# Altium PCB 88路激光器工程.PcbDoc (part 1 of 2)
Units mm, origin at the board's own origin, x right, y up, seen from the top; angles counter-clockwise.
Board outline 290.3 x 80 mm, 2 copper layers (Top Layer, Bottom Layer), stack 1.4 mm thick; 159 components, 203 nets, 686 pads, 305 vias.
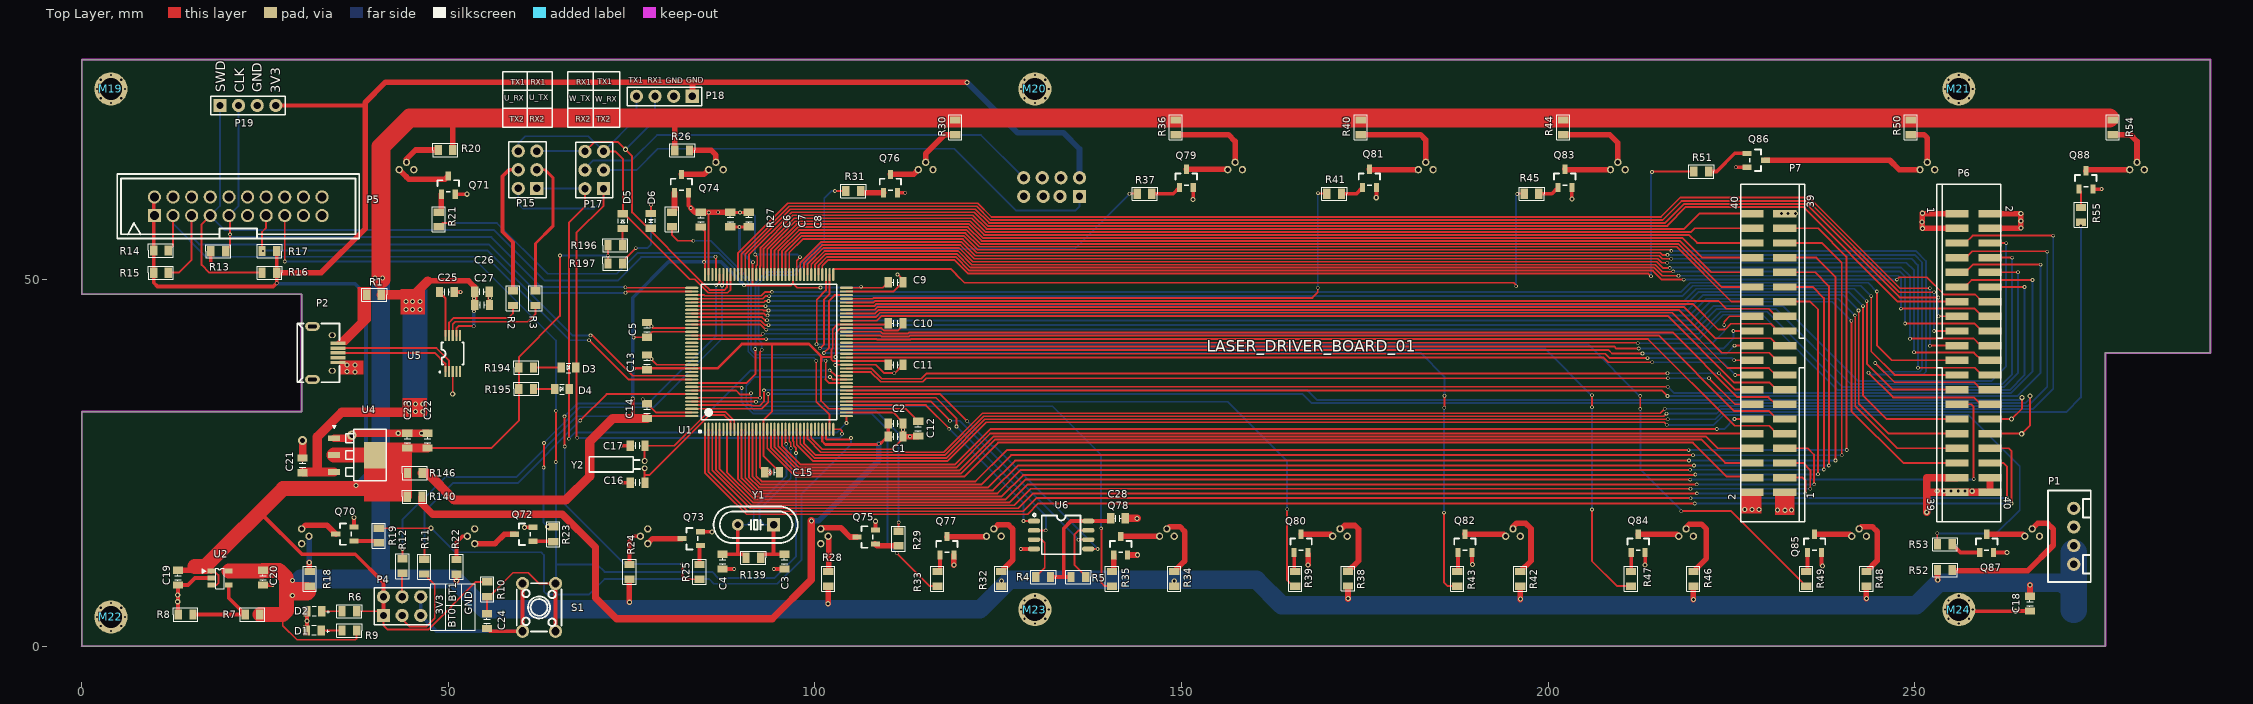
[diagram p0: Top Layer view]
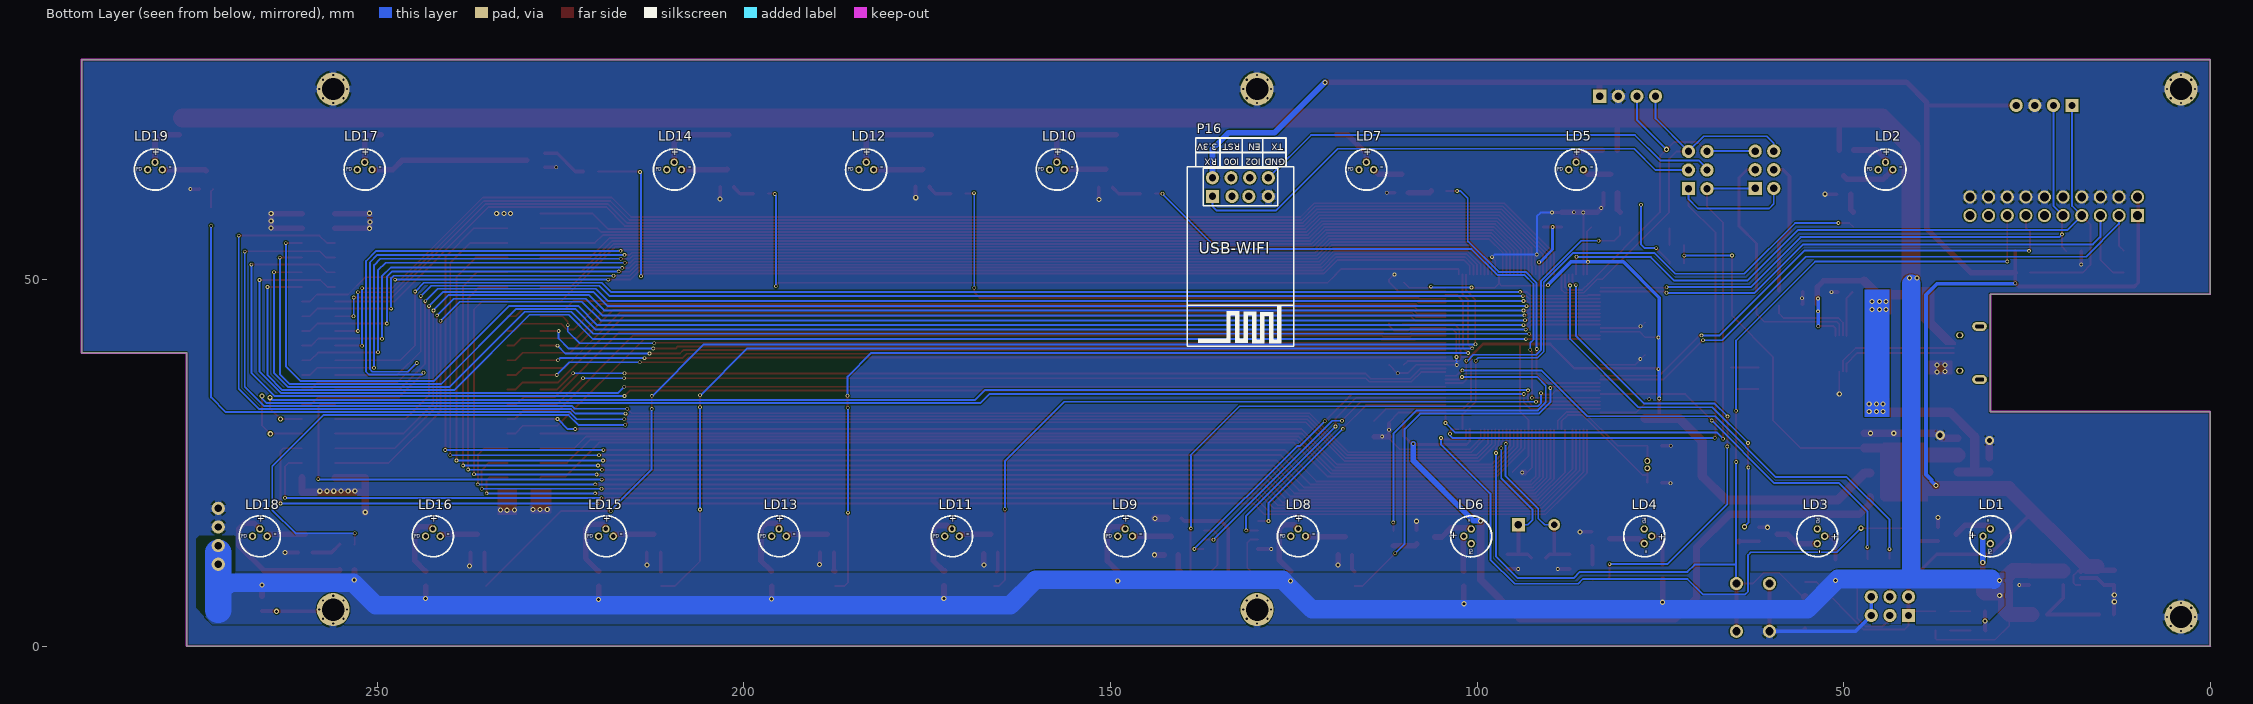
[diagram p1: Bottom Layer view, seen from below]

## Layer stack, top to bottom
Top Solder: solder mask 0.1, Solder Resist, Dk 3.5
Top Layer: signal copper 0.6
Dielectric 1: dielectric 0.2, FR-4, Dk 4.8
Bottom Layer: signal copper 0.6
Bottom Solder: solder mask 0.1, Solder Resist, Dk 3.5

## Board outline
0.005,32 30.005,32 30.005,48 0.005,48 0.005,80 290.3,80 290.3,40 276,40 276,0 0,0

## Design rules (kind name [scope] priority, off if disabled: settings)
Clearance [All] p1: gap=0.152 ignorepadtopadclearanceinfootprint=FALSE
DiffPairsRouting [All] p1: maxlimit=0.254 minlimit=0.178 mostfreqgap=0.178 toplayer_minwidth=0.127 toplayer_maxwidth=0.127 toplayer_prefwidth=0.127 bottomlayer_minwidth=0.127 bottomlayer_maxwidth=0.127 bottomlayer_prefwidth=0.127 maxuncoupledlength=12.7
HoleSize [All] p1: absolutevalues=TRUE maxlimit=3.81 minlimit=0.025 maxpercent=80.000 minpercent=20.000
HoleToHoleClearance [All] p1: gap=0.178 allowstackedmicrovias=TRUE
MinimumSolderMaskSliver [All] p1 off: minsoldermaskwidth=0.254
PolygonConnect [All] p1: connectstyle=Relief reliefconductorwidth=1.016 reliefentries=4 polygonreliefangle="90 Angle" airgapwidth=0.254
RoutingVias [All] p1: holewidth=0.711 width=1.27 viastyle="Through Hole" minholewidth=0.711 minwidth=1.27 maxholewidth=0.711 maxwidth=1.27
SilkToSilkClearance [All] p1 off: silktosilkclearance=0.254
SilkToSolderMaskClearance [IsPad] p1 off: minsilkscreentomaskgap=0.254 clearancetoexposedcopper=TRUE
SolderMaskExpansion [All] p1: expansion=0.102
Width [All] p1: maxlimit=5.08 minlimit=0.254 preferedwidth=0.508 minimp=50.000000 maximp=50.000000 favimp=50.000000
24 further rules are at their usual default settings.

## Components (designator, comment, footprint, x,y, rotation, side; value= is the part's Value field where it differs from the comment)
C1 "0.1uF" C0805 111,28.6 r180 top value=104
C2 "10uF" C0805 111,30.375 r180 top
C3 "30pF" C0805 95.85,11.55 r90 top
C4 "30pF" C0805 87.4,11.55 r90 top
C5 "0.1uF" C0805 77.1,43.15 r270 top value=104
C6 "0.1uF" C0805 84.425,58.175 r270 top value=104
C7 "0.1uF" C0805 88.45,58.2 r270 top value=104
C8 "0.1uF" C0805 90.975,58.2 r270 top value=104
C9 "0.1uF" C0805 111,49.65 r180 top value=104
C10 "0.1uF" C0805 111,44.05 r180 top value=104
C11 "0.1uF" C0805 111,38.375 r180 top value=104
C12 "0.1uF" C0805 114.075,29.675 r90 top value=104
C13 "0.1uF" C0805 77.1,38.725 r270 top value=104
C14 "0.1uF" C0805 77.1,32.075 r270 top value=104
C15 "0.1uF" C0805 94.175,23.75 r0 top value=104
C16 "30pF" C0805 75.825,22.3 r0 top
C17 "30pF" C0805 75.825,27.35 r0 top
C18 "10uF/6.3V" C0805 265.7,5.825 r90 top
C19 "10uF/6.3V" C0805 13.125,9.35 r90 top
C20 "10uF/6.3V" C0805 24.725,9.35 r90 top
C21 "100nF/25V" C0805 30.125,24.675 r270 top value=104
C22 "100nF/25V" C0805 47.175,28.05 r270 top value=104
C23 "10uF/6.3V" C0805 44.4,28.05 r270 top
C24 "100nF/25V" C0805 55.275,3.425 r270 top value=104
C25 "100nF/25V" C0805 49.802,48.315 r180 top
C26 "10uF/6.3V" C0805 54.59,48.365 r180 top
C27 "100nF/25V" C0805 54.625,46.55 r180 top
C28 "100nF/25V" C0805 141.325,17.45 r180 top
D1 "LED" LED_0805 31.675,2.15 r180 top
D2 "LED" LED_0805 31.725,4.775 r180 top
D3 "LED" LED_0805 66.4,38.025 r0 top
D4 "LED" LED_0805 65.5,35.1 r0 top
D5 "LED" LED_0805 73.8,57.975 r90 top
D6 "LED" LED_0805 77.625,58.025 r270 top
LD1 "LD" LD_3P 30,15 r90 bottom
LD2 "LD" LD_3P 44.3,65 r180 bottom
LD3 "LD" LD_3P 53.6,15 r270 bottom
LD4 "LD" LD_3P 77.2,15 r270 bottom
LD5 "LD" LD_3P 86.5,65 r180 bottom
LD6 "LD" LD_3P 100.8,15 r90 bottom
LD7 "LD" LD_3P 115.1,65 r180 bottom
LD8 "LD" LD_3P 124.4,15 r180 bottom
LD9 "LD" LD_3P 148,15 r180 bottom
LD10 "LD" LD_3P 157.3,65 r180 bottom
LD11 "LD" LD_3P 171.6,15 r180 bottom
LD12 "LD" LD_3P 183.3,65 r180 bottom
LD13 "LD" LD_3P 195.2,15 r180 bottom
LD14 "LD" LD_3P 209.5,65 r180 bottom
LD15 "LD" LD_3P 218.8,15 r180 bottom
LD16 "LD" LD_3P 242.4,15 r180 bottom
LD17 "LD" LD_3P 251.7,65 r180 bottom
LD18 "LD" LD_3P 266,15 r180 bottom
LD19 "LD" LD_3P 280.3,65 r180 bottom
M19 "HOLE-8STARS" HOLE_3MM 4,76 r0 top
M20 "HOLE-8STARS" HOLE_3MM 130,76 r0 top
M21 "HOLE-8STARS" HOLE_3MM 256,76 r0 top
M22 "HOLE-8STARS" HOLE_3MM 4,4 r0 top
M23 "HOLE-8STARS" HOLE_3MM 130,5 r0 top
M24 "HOLE-8STARS" HOLE_3MM 256,5 r0 top
P1 "Header 4" XH2.54MM_4P_立式 271.675,15 r90 top
P2 "USB-B(Mini)" MICRO_USB5P_带牛角 32.805,40 r270 top locked
P4 "Header 3X2" HDR2X3 41.16,4.2 r0 top
P5 "JTAG" JTAG_2X10P_2.54MM 21.35,60 r0 top
P6 "Header 20X2" JATG_2.0MM_2X20P_SMD 258,40 r270 top locked
P7 "Header 20X2" JATG_2.0MM_2X20P_SMD 230,40 r90 top locked
P15 "Header 3X2A" HDR2X3_CEN 62.075,62.445 r90 top
P16 "USB-WIFI" UART-WIFI 132.275,62.62 r0 bottom locked
P17 "Header 3X2" HDR2X3 71.175,62.41 r90 top
P18 "Header 4" HDR1X4 83.28,75 r180 top
P19 "Header 4" HDR1X4 18.86,73.75 r0 top
Q70 "NMOS" SOT23-3 35.9,15.3 r0 top
Q71 "NMOS" SOT23-3 50,62.9 r270 top
Q72 "NMOS" SOT23-3 60.3,15.275 r0 top
Q73 "NMOS" SOT23-3 83.125,14.675 r0 top
Q74 "NMOS" SOT23-3 81.8,63.1 r270 top
Q75 "NMOS" SOT23-3 107,14.9 r0 top
Q76 "NMOS" SOT23-3 110.3,63.1 r270 top
Q77 "NMOS" SOT23-3 118,13.7 r270 top
Q78 "NMOS" SOT23-3 141.7,13.7 r270 top
Q79 "NMOS" SOT23-3 150.65,63.8 r270 top
Q80 "NMOS" SOT23-3 166.3,14.025 r270 top
Q81 "NMOS" SOT23-3 175.625,63.8 r270 top
Q82 "NMOS" SOT23-3 188.65,14.025 r270 top
Q83 "NMOS" SOT23-3 202.275,63.8 r270 top
Q84 "NMOS" SOT23-3 212.275,14.025 r270 top
Q85 "NMOS" SOT23-3 236.325,14.025 r270 top
Q86 "NMOS" SOT23-3 228.375,66.275 r180 top
Q87 "NMOS" SOT23-3 259.8,14.025 r270 top
Q88 "NMOS" SOT23-3 273.325,63.6 r270 top
R1 "0R" R0805 39.875,47.925 r180 top
R2 "200R" R0805 58.825,47.475 r270 top
R3 "200R" R0805 61.9,47.475 r270 top
R4 "1K" R0805 131.125,9.45 r180 top
R5 "1K" R0805 135.925,9.45 r180 top
R6 "10k" R0805 36.5,4.775 r180 top
R7 "24K" R0805 23.303,4.325 r0 top value=NC/10K
R8 "30K" R0805 14.172,4.325 r0 top value=NC/10K
R9 "10k" R0805 36.503,2.15 r180 top
R10 "10K" R0805 55.3,7.775 r90 top
R11 "10K" R0805 46.725,10.85 r270 top
R12 "10K" R0805 43.75,10.95 r90 top
R13 "10K" R0805 18.625,53.875 r0 top
R14 "10K" R0805 10.825,53.975 r0 top
R15 "10K" R0805 10.825,50.95 r0 top
R16 "10K" R0805 25.6,50.95 r180 top
R17 "10K" R0805 25.6,53.9 r180 top
R18 "200R" R0805 31.1,9.2 r270 top
R19 "2k" R0805 40.5,15.1 r90 top
R20 "200R" R0805 49.625,67.675 r0 top
R21 "2k" R0805 48.7,58.2 r270 top
R22 "200R" R0805 51.125,10.825 r270 top
R23 "2k" R0805 64.325,15.275 r90 top
R24 "200R" R0805 74.7,10.15 r270 top
R25 "2k" R0805 84.25,10.15 r270 top
R26 "200R" R0805 81.9,67.625 r180 top
R27 "2k" R0805 80.5,58.2 r270 top
R28 "200R" R0805 101.8,9.2 r270 top
R29 "2k" R0805 111.4,14.7 r90 top
R30 "200R" R0805 119.15,70.775 r90 top
R31 "2k" R0805 105.225,62.1 r180 top
R32 "200R" R0805 125.4,9.2 r270 top
R33 "2k" R0805 116.7,9.2 r270 top
R34 "200R" R0805 149,9.2 r270 top
R35 "2k" R0805 140.5,9.2 r270 top
R36 "200R" R0805 149.2,70.775 r90 top
R37 "2k" R0805 144.95,61.725 r180 top
R38 "200R" R0805 172.7,9.225 r270 top
R39 "2k" R0805 165.5,9.2 r270 top
R40 "200R" R0805 174.425,70.775 r90 top
R41 "2k" R0805 170.8,61.725 r180 top
R42 "200R" R0805 196.2,9.2 r270 top
R43 "2k" R0805 187.6,9.2 r270 top
R44 "200R" R0805 202.05,70.775 r90 top
R45 "2k" R0805 197.725,61.725 r180 top
R46 "200R" R0805 219.8,9.2 r270 top
R47 "2k" R0805 211.3,9.2 r270 top
R48 "200R" R0805 243.4,9.2 r270 top
R49 "2k" R0805 235.2,9.2 r270 top
R50 "200R" R0805 249.425,70.775 r90 top
R51 "2k" R0805 220.875,64.75 r180 top
R52 "200R" R0805 254.1,10.4 r180 top
R53 "2k" R0805 254.1,13.9 r180 top
R54 "200R" R0805 277,70.775 r90 top
R55 "2k" R0805 272.65,58.825 r270 top
R139 "1M" R0805 91.6,12.075 r180 top
R140 "0R" R0805 45.4,20.4 r0 top
R146 "0R" R0805 45.45,23.625 r0 top
R194 "10k" R0805 60.625,38.025 r0 top
R195 "10k" R0805 60.625,35.1 r0 top
R196 "10k" R0805 72.775,54.7 r0 top
R197 "10k" R0805 72.775,52.2 r0 top
S1 "SW-PB" KEY_PB_6X6X5 62.375,5.3 r90 top (schematic designator RESET1)
U1 "STM32F103ZET6" LQFP-144 93.751,40.14 r0 top locked
U2 "SPX3819M5-L-2-5/TR" SOT23-5 18.875,9.3 r0 top value=SPX3819M5-L-1-2/TR
U4 "AMS1117 3.3" SOT-223 37.525,26.075 r270 top
U5 "CH340E" MSOP-10 50.602,39.907 r90 top
U6 "W25Q128" SOIC-8_208MIL 133.575,15.175 r0 top
Y1 "8MHz" HC-49S 91.925,16.575 r180 top
Y2 "32.768K" XTAL_32KHZ_TH__2P 76.775,24.775 r180 top

## Footprints (in the part's own frame and the unit in brackets; to place one, negate y for a bottom-side part, rotate by r counter-clockwise, add the part's x,y. Pads: shape width x height; smd on the part's side, far side on the other; paste and mask are expansions set on the pad)
C0805 [mm]
  rect 1x1.4 smd: 1(-1.003,0) 2(1.003,0)
  silkscreen extent -0.43,-0.43 0.43,0.45, body extent -1.21,-0.62 1.14,0.67, height 0.5
HC-49S [mm]
  rect 1.8x1.8 hole 1: 1(-2.438,0)
  round 1.6 hole 0.9: 2(2.438,0)
  silkscreen extent -5.74,-2.5 5.74,2.5
HDR1X4 [mm] "Connector; Header; 4 Position"
  rect 1.8x1.8 hole 1: 1(0,0)
  round 1.8 hole 1: 2(2.54,0) 3(5.08,0) 4(7.62,0)
  silkscreen extent -1.27,-1.27 8.89,1.27
HDR2X3 [mm] "Connector; Header; 3x2 Position"
  rect 1.8x1.8 hole 1: 1(0,0)
  round 1.8 hole 1: 2(0,2.54) 3(2.54,0) 4(2.54,2.54) 5(5.08,0) 6(5.08,2.54)
  silkscreen extent -1.27,-1.27 6.35,3.81
HDR2X3_CEN [mm] "Connector; Header; 3x2 Position"
  rect 1.8x1.8 hole 1: 1(0,0)
  round 1.8 hole 1: 2(2.54,0) 3(5.08,0) 4(0,2.54) 5(2.54,2.54) 6(5.08,2.54)
  silkscreen extent -1.27,-1.27 6.35,3.81
HOLE_3MM [mm]
  round 0.5 hole 0.3: 1(0,1.9) 2(-1.4,1.25) 3(-1.9,0) 4(-1.4,-1.25) 5(0,-1.9) 6(1.4,-1.25) 7(1.9,0) 8(1.4,1.25)
  round 4.5 hole 3.05: 9(0,0)
JATG_2.0MM_2X20P_SMD [mm]
  rect 1x3.2 smd: 1(-19,-2.25) 2(-19,2.25) 3(-17,-2.25) 4(-17,2.25) 5(-15,-2.25) 6(-15,2.25) 7(-13,-2.25) 8(-13,2.25) 9(-11,-2.25) 10(-11,2.25) 11(-9,-2.25) 12(-9,2.25) 13(-7,-2.25) 14(-7,2.25) 15(-5,-2.25) 16(-5,2.25) 17(-3,-2.25) 18(-3,2.25) 19(-1,-2.25) 20(-1,2.25) 21(1,-2.25) 22(1,2.25) 23(3,-2.25) 24(3,2.25) 25(5,-2.25) 26(5,2.25) 27(7,-2.25) 28(7,2.25) 29(9,-2.25) 30(9,2.25) 31(11,-2.25) 32(11,2.25) 33(13,-2.25) 34(13,2.25) 35(15,-2.25) 36(15,2.25) 37(17,-2.25) 38(17,2.25) 39(19,-2.25) 40(19,2.25)
  silkscreen extent -23,-5 23,3.75, body extent -22.99,-4.25 23,3.8, height 6.9
JTAG_2X10P_2.54MM [mm]
  rect 1.8x1.8 hole 1.2: 1(-11.43,-1.27)
  round 1.8 hole 1.2: 2(-11.43,1.27) 3(-8.89,-1.27) 4(-8.89,1.27) 5(-6.35,-1.27) 6(-6.35,1.27) 7(-3.81,-1.27) 8(-3.81,1.27) 9(-1.27,-1.27) 10(-1.27,1.27) 11(1.27,-1.27) 12(1.27,1.27) 13(3.81,-1.27) 14(3.81,1.27) 15(6.35,-1.27) 16(6.35,1.27) 17(8.89,-1.27) 18(8.89,1.27) 19(11.43,-1.27) 20(11.43,1.27)
  silkscreen extent -16.5,-4.4 16.5,4.4
KEY_PB_6X6X5 [mm]
  round 1.8 hole 1.1: 1(-3.251,-2.25) 1(3.251,-2.25) 2(-3.251,2.25) 2(3.251,2.25)
  silkscreen extent -3.3,-3.05 3.3,3.05
LD_3P [mm]
  round 1 hole 0.6: 1(0,1) 2(1,0) ""(-1,0)
  silkscreen extent -2.81,-2.8 2.79,2.8, body extent -3,-3 3,3, height 5
LED_0805 [mm]
  rect 1x1.4 smd: 1(-1.003,0) 2(1.003,0)
  silkscreen extent -2.07,-0.7 0.3,0.6, body extent -1.21,-0.62 1.14,0.67, height 0.5
LQFP-144 [mm]
  oval 0.28x1.796 smd: 1(-8.75,-10.55) 2(-8.25,-10.55) 3(-7.75,-10.55) 4(-7.25,-10.55) 5(-6.75,-10.55) 6(-6.25,-10.55) 7(-5.75,-10.55) 8(-5.25,-10.55) 9(-4.75,-10.55) 10(-4.25,-10.55) 11(-3.75,-10.55) 12(-3.25,-10.55) 13(-2.75,-10.55) 14(-2.25,-10.55) 15(-1.75,-10.55) 16(-1.25,-10.55) 17(-0.75,-10.55) 18(-0.25,-10.55) 19(0.25,-10.55) 20(0.75,-10.55) 21(1.25,-10.55) 22(1.75,-10.55) 23(2.25,-10.55) 24(2.75,-10.55) 25(3.25,-10.55) 26(3.75,-10.55) 27(4.25,-10.55) 28(4.75,-10.55) 29(5.25,-10.55) 30(5.75,-10.55) 31(6.25,-10.55) 32(6.75,-10.55) 33(7.25,-10.55) 34(7.75,-10.55) 35(8.25,-10.55) 36(8.75,-10.55) 73(8.75,10.55) 74(8.25,10.55) 75(7.75,10.55) 76(7.25,10.55) 77(6.75,10.55) 78(6.25,10.55) 79(5.75,10.55) 80(5.25,10.55) 81(4.75,10.55) 82(4.25,10.55) 83(3.75,10.55) 84(3.25,10.55) 85(2.75,10.55) 86(2.25,10.55) 87(1.75,10.55) 88(1.25,10.55) 89(0.75,10.55) 90(0.25,10.55) 91(-0.25,10.55) 92(-0.75,10.55) 93(-1.25,10.55) 94(-1.75,10.55) 95(-2.25,10.55) 96(-2.75,10.55) 97(-3.25,10.55) 98(-3.75,10.55) 99(-4.25,10.55) 100(-4.75,10.55) 101(-5.25,10.55) 102(-5.75,10.55) 103(-6.25,10.55) 104(-6.75,10.55) 105(-7.25,10.55) 106(-7.75,10.55) 107(-8.25,10.55) 108(-8.75,10.55)
  oval 1.796x0.28 smd: 37(10.55,-8.75) 38(10.55,-8.25) 39(10.55,-7.75) 40(10.55,-7.25) 41(10.55,-6.75) 42(10.55,-6.25) 43(10.55,-5.75) 44(10.55,-5.25) 45(10.55,-4.75) 46(10.55,-4.25) 47(10.55,-3.75) 48(10.55,-3.25) 49(10.55,-2.75) 50(10.55,-2.25) 51(10.55,-1.75) 52(10.55,-1.25) 53(10.55,-0.75) 54(10.55,-0.25) 55(10.55,0.25) 56(10.55,0.75) 57(10.55,1.25) 58(10.55,1.75) 59(10.55,2.25) 60(10.55,2.75) 61(10.55,3.25) 62(10.55,3.75) 63(10.55,4.25) 64(10.55,4.75) 65(10.55,5.25) 66(10.55,5.75) 67(10.55,6.25) 68(10.55,6.75) 69(10.55,7.25) 70(10.55,7.75) 71(10.55,8.25) 72(10.55,8.75) 109(-10.55,8.75) 110(-10.55,8.25) 111(-10.55,7.75) 112(-10.55,7.25) 113(-10.55,6.75) 114(-10.55,6.25) 115(-10.55,5.75) 116(-10.55,5.25) 117(-10.55,4.75) 118(-10.55,4.25) 119(-10.55,3.75) 120(-10.55,3.25) 121(-10.55,2.75) 122(-10.55,2.25) 123(-10.55,1.75) 124(-10.55,1.25) 125(-10.55,0.75) 126(-10.55,0.25) 127(-10.55,-0.25) 128(-10.55,-0.75) 129(-10.55,-1.25) 130(-10.55,-1.75) 131(-10.55,-2.25) 132(-10.55,-2.75) 133(-10.55,-3.25) 134(-10.55,-3.75) 135(-10.55,-4.25) 136(-10.55,-4.75) 137(-10.55,-5.25) 138(-10.55,-5.75) 139(-10.55,-6.25) 140(-10.55,-6.75) 141(-10.55,-7.25) 142(-10.55,-7.75) 143(-10.55,-8.25) 144(-10.55,-8.75)
  silkscreen extent -9.57,-11 9.25,9.25, body extent -9.25,-9.25 9.25,9.25, height 1.6
MICRO_USB5P_带牛角 [mm]
  rect 0.45x2 smd: 1(-1.31,2.156) 2(-0.66,2.156) 3(-0.01,2.156) 4(0.64,2.156) 5(1.29,2.156)
  oval 0.8x1 hole 0.6: 6(-2.41,1.371) 7(2.431,1.371)
  oval 1.2x2 hole 0.5 slot 1.2 at 90 deg: 8(3.619,-1.329) 9(-3.619,-1.329)
  silkscreen extent -4,-3.4 4,2.36
MSOP-10 [mil]
  rect 59.06x12 smd: 1(-96.5,39.37) 2(-96.5,19.68) 3(-96.5,0) 4(-96.5,-19.69) 5(-96.5,-39.37) 6(96.5,-39.37) 7(96.5,-19.69) 8(96.5,0) 9(96.5,19.68) 10(96.5,39.37)
  silkscreen extent -103,-59 59,74
R0805 [mm]
  rect 1x1.4 smd: 1(-1.003,0) 2(1.003,0)
  silkscreen extent -1.71,-0.9 1.69,0.9, body extent -1.21,-0.62 1.14,0.67, height 0.5
SOIC-8_208MIL [mm]
  oval 1.698x0.65 smd: 1(-3.7,1.905) 2(-3.7,0.635) 3(-3.7,-0.635) 4(-3.7,-1.905) 5(3.7,-1.905) 6(3.7,-0.635) 7(3.7,0.635) 8(3.7,1.905)
  silkscreen extent -3.84,-2.63 2.64,2.92, body extent -2.65,-2.63 2.64,2.64, height 1
SOT23-3 [mm]
  rect 1.25x0.7 smd: 1(1.25,-0.95) 2(1.25,0.95) 3(-1.25,0)
  silkscreen extent -0.65,-1.46 0.9,1.46
SOT23-5 [mm]
  rect 1x0.7 smd: 1(-1.2,0.95) 2(-1.2,0) 3(-1.2,-0.95) 4(1.2,-0.95) 5(1.2,0.95)
  silkscreen extent -2.4,-1.48 0.55,1.37, body extent -1.5,-1.5 1.5,1.5, height 1.3
SOT-223 [mm]
  rect 0.8x1.6 smd: 1(-2.3,-3.1) 2(0,-3.1) 3(2.3,-3.1)
  rect 3.6x3 smd: 4(0,2.5)
  silkscreen extent -4.05,-3.37 3.5,4, body extent -3.25,-3.6 3.25,3.4, height 1.69
UART-WIFI [mm]
  rect 1.8x1.8 hole 1: 1(3.81,1.27)
  round 1.8 hole 1: 2(1.15,1.27) 3(-1.15,1.27) 4(-3.81,1.27) 5(3.81,-1.27) 6(1.27,-1.27) 7(-1.27,-1.27) 8(-3.81,-1.27)
  silkscreen extent -7.25,-6.73 7.25,21.71, body extent -7.24,-2.79 7.24,21.72, height 6
XH2.54MM_4P_立式 [mm]
  round 1.8 hole 1: 1(-3.81,0) 2(-1.27,0) 3(1.27,0) 4(3.81,0)
  silkscreen extent -6.25,-2.31 6.25,3.5, body extent -6.25,-2.31 6.25,3.5, height 6.9
XTAL_32KHZ_TH__2P [mm]
  round 0.8 hole 0.5: 1(0,0.5) 2(0,-0.5)
  silkscreen extent 0.64,-1.07 7.55,1.02

## Part data
C1 C2 C3 C4 C5 C6 C7 C8 C9 C10 C11 C12 C13 C14 C15 C16 C17 C21 C22 C24: library part Cap, "Capacitor", LatestRevisionDate=17-Jul-2002, LatestRevisionNote="Re-released for DXP Platform.", PackageDescription="Radial Cap, Thru-Hole; 2 Leads; 0.3 in Pin Spacing", PackageReference=RAD-0.3, Published=8-Jun-2000, Publisher="Altium Limited"
C18 C19 C20 C23 C25 C26 C27 C28: library part C
D1 D2 D3 D4 D5 D6: library part LED_IR, "0603 无色透明 λp=940nm VR=5V VF(typ)=1.2V IF=65mA PD=130mW"
P1 P18 P19: "Header, 4-Pin", LatestRevisionDate=17-Jul-2002, LatestRevisionNote="Re-released for DXP Platform.", Publisher="Altium Limited"
P2: library part USB5
P4 P15 P17: "Header, 3-Pin, Dual row", LatestRevisionDate=17-Jul-2002, LatestRevisionNote="Re-released for DXP Platform.", Publisher="Altium Limited"
P5: library part "Header 10X2", "Header, 10-Pin, Dual row", LatestRevisionDate=17-Jul-2002, LatestRevisionNote="Re-released for DXP Platform.", Publisher="Altium Limited"
P6 P7: "Header, 20-Pin, Dual row", LatestRevisionDate=17-Jul-2002, LatestRevisionNote="Re-released for DXP Platform.", Publisher="Altium Limited"
R1 R2 R3 R4 R5 R6 R9 R194 R195 R196 R197: library part R
R7 R8 R10 R11 R12 R13 R14 R15 R16 R17 R18 R19 R20 R21 R22 R23 R24 R25 R26 R27 R28 R29 R30 R31 R32 R33 R34 R35 R36 R37 R38 R39 R40 R41 R42 R43 R44 R45 R46 R47 R48 R49 R50 R51 R52 R53 R54 R55 R139 R140 R146: library part Res2, "Resistor", LatestRevisionDate=17-Jul-2002, LatestRevisionNote="Re-released for DXP Platform.", PackageDescription="Axial Device, Thru-Hole; 2 Leads; 0.4 in Pin Spacing", PackageReference=AXIAL-0.4, Published=8-Jun-2000, Publisher="Altium Limited"
S1: "Switch", LatestRevisionDate=17-Jul-2002, LatestRevisionNote="Re-released for DXP Platform.", PackageDescription="Switch; 2 Leads", PackageReference=SPST-2, Published=24-Mar-1999, Publisher="Altium Limited"
U1: "ARM Cortex-M3 32-bit MCU, 512 KB Flash, 64 KB Internal RAM, 112 I/Os, 144-pin LQFP, -40 to 85 degC, Tray"
U2: library part SPX3819M5-L-1-2/TR, "500mA Low-Noise LDO Voltage Regulator", Manufacture=EXTR, ID=110900015, Order No=SPX3819M5-L-1-2/TR
U4: library part REG1117-3.3, "800mA and 1A Low Dropout Positive Regulator 2.85V, 3.3V, 5V, and Adjustable", ComponentLink1Description="Manufacturer Link", ComponentLink1URL=http://www.ti.com/, ComponentLink2Description=Datasheet, ComponentLink2URL=http://www-s.ti.com/sc/ds/REG1117.pdf, DatasheetVersion=Sep-1997, LatestRevisionDate=17-Jul-2002, LatestRevisionNote="Re-released for DXP Platform.", PackageDescription="SOT-223/SC-73; 4 Leads; Body 6.7 x 7.3 mm, inc. leads (LxW max)", PackageReference=ZZ311, PackageVersion=revC, Published=8-Jun-2000, Publisher="Altium Limited"
U6: library part W25X16, "W25X16;SST25VF016;MX25L1605"
Y1 Y2: library part XTAL, "Crystal Oscillator", LatestRevisionDate=17-Jul-2002, LatestRevisionNote="Re-released for DXP Platform.", PackageDescription="Crystal, Thru-Hole; 2 Leads; Body 3.1 x 8.2 mm (Dia.xH)", PackageReference=R38, Published=8-Jun-2000, Publisher="Altium Limited"

## Via types
v1: diameter 0.5, hole 0.3, Top Layer to Bottom Layer, tented both sides, 216 vias
v2: diameter 0.7, hole 0.4, Top Layer to Bottom Layer, tented both sides, 87 vias
v3: diameter 1.27, hole 0.711, Top Layer to Bottom Layer, tented both sides, 2 vias

## Nets (pads, with @x,y where several pads share a name; then routed paths per layer and width w, separated by ;. In a path a pad name is that pad's centre, name@x,y a point inside that pad or via, vN(x,y) a via of type N, cw(c..) or ccw(c..) an arc to the next point about the centre after c; other vN are vias at no path point)
BOOT0: R11.1 U1.138 | length 49.6
  Top Layer w0.254: R11.1@46.725,11.853 46.754,11.883 v1@46.754,13.525 ; v1(68,30.8) 71.59,34.39 U1.138@83.202,34.39
  Bottom Layer w0.254: v1(46.775,13.525) 46.775,18.4 50.625,22.25 59.45,22.25 v1(68,30.8)
BOOT1: R12.2 U1.48 | length 74.5
  Top Layer w0.254: R12.2@43.75,11.953 v1(43.75,13.25) ; v1@102.05,37.65 102.81,36.89 U1.48@104.301,36.89
  Bottom Layer w0.254: v1(43.75,13.25) 43.75,17.225 49.6,23.075 59.25,23.075 67.55,31.375 84.975,31.375 91.225,37.625 v1(102,37.625)
CH340_RXD: P15.5 R2.1 | length 18.7
  Top Layer w0.508: R2.1@58.825,48.478 58.825,55.1 57.4,56.525 57.4,64.1 58.285,64.985 P15.5@59.535,64.985
CH340_TXD: P15.2 R3.1 | length 19.4
  Top Layer w0.406: P15.2@61.535,64.99 P15.2@61.807,64.718 ; R3.1@61.9,48.478 61.9,54.925 64.25,57.275 64.25,63.925 63.19,64.985 P15.2@62.075,64.985
ESP_EN: P16.7
ESP_RST: P16.6
GND: C1.1 C2.1 C3.1 C4.1 C5.1 C6.1 C7.1 C8.1 C9.1 C10.1 C11.1 C12.1 C13.1 C14.1 C15.1 C16.1 C17.1 C18.1 C19.1 C20.1 C21.1 C22.1 C23.1 C24.2 C25.1 C26.1 C27.1 C28.1 D1.2 D2.2 M19.1 M19.2 M19.3 M19.4 M19.5 M19.6 M19.7 M19.8 M19.9 M20.1 M20.2 M20.3 M20.4 M20.5 M20.6 M20.7 M20.8 M20.9 M21.1 M21.2 M21.3 M21.4 M21.5 M21.6 M21.7 M21.8 M21.9 M22.1 M22.2 M22.3 M22.4 M22.5 M22.6 M22.7 M22.8 M22.9 M23.1 M23.2 M23.3 M23.4 M23.5 M23.6 M23.7 M23.8 M23.9 M24.1 M24.2 M24.3 M24.4 M24.5 M24.6 M24.7 M24.8 M24.9 P1.3 P1.4 P2.5 P4.5 P4.6 P5.4 P5.6 P5.8 P5.10 P5.12 P5.14 P5.16 P5.18 P5.20 P6.1 P6.2 P6.3 P6.4 P6.37 P6.38 P6.39 P6.40 P7.1 P7.2 P7.39 P16.4 P18.2 P19.3 Q70.2 Q71.2 Q72.2 Q73.2 Q74.2 Q75.2 Q76.2 Q77.2 Q78.2 Q79.2 Q80.2 Q81.2 Q82.2 Q83.2 Q84.2 Q85.2 Q86.2 Q87.2 Q88.2 R8.1 R13.1 S1.2 U1.16 U1.30 U1.38 U1.51 U1.61 U1.71 U1.83 U1.94 U1.107 U1.120 U1.130 U1.143 U2.2 U4.1 U5.3 U6.4 | length 279.2
  Top Layer w0.254: v2@50.602,34.319 U5.3@50.602,37.456 ; C14.1@77.1,33.078 78.288,31.89 U1.143@83.202,31.89 ; C13.1@77.1,39.728 78.438,38.39 U1.130@83.202,38.39 ; C5.1@77.1,44.153 77.863,43.39 U1.120@83.202,43.39 ; C6.1@84.425,59.178 85.501,59.178 U1.107@85.501,50.69 ; C8.1@90.95,59.178 C8.1@90.975,59.203 ; v1(91.85,53.425) 92.129,53.146 92.129,52.029 92.001,51.901 U1.94@92.001,50.69 ; U1.16@92.501,29.59 92.501,24.42 C15.1@93.172,23.75 ; U1.83@97.501,50.69 97.529,50.718 97.529,52.604 v1@98.025,53.1 ; U1.30@99.501,29.59 99.501,28.349 100.974,26.876 110.551,26.876 112.003,28.328 C1.1@112.003,28.6 ; v1@102.765,38.39 U1.51@104.301,38.39 108.285,38.39 109.425,37.25 110.878,37.25 C11.1@112.003,38.375 ; v1(102.8,39.45) 102.841,39.491 102.841,42.781 103.37,43.309 104.221,43.309 U1.61@104.301,43.39 109.062,43.39 109.381,43.071 111.371,43.071 112.003,43.703 C10.1@112.003,44.05 ; U1.38@104.301,31.89 110.668,31.89 112.003,30.555 C2.1@112.003,30.375 ; U1.71@104.301,48.39 110.743,48.39 C9.1@112.003,49.65 112.003,50.022 v1@111.25,50.775 ; C12.1@114.003,28.6 C12.1@114.075,28.672
  Top Layer w0.406: C7.1@88.425,59.178 C8.1@90.95,59.178
  Top Layer w0.508: R8.1@13.168,4.325 13.125,4.368 C19.1@13.125,8.347 14.497,8.347 15.45,9.3 U2.2@17.675,9.3 ; v1(17.6,52.075) 17.622,52.097 R13.1@17.622,53.875 ; C20.1@24.725,8.347 v1(26.047,8.347) ; D1.2@30.672,2.15 30.722,2.2 D2.2@30.722,4.775 ; Q70.2@37.15,16.25 v2@37.15,17.575 ; C25.1@50.805,48.315 51.66,48.315 v1(51.675,48.3) ; Q71.2@50.95,61.65 v2@52.525,61.65 ; C24.2@55.275,2.422 55.648,2.049 S1.2@60.125,2.049 S1.2@60.125,8.551 ; C26.1@55.593,48.365 55.593,46.711 C27.1@55.619,46.685 ; v2(60.375,16.225) Q72.2@61.55,16.225 ; v1(73.6,27.35) C17.1@74.822,27.35 ; v1(73.625,22.225) 73.7,22.3 C16.1@74.822,22.3 ; Q74.2@82.75,61.85 82.75,60.103 v1(83.075,59.779) ; Q73.2@84.375,15.625 85.95,15.625 v2(85.975,15.6) ; C4.1@87.4,10.547 v1(88.997,10.547) ; v1(94.378,10.547) C3.1@95.85,10.547 ; Q75.2@108.25,15.85 v2(108.25,17.05) ; Q76.2@111.25,61.85 v1(112.325,61.85) ; C1.1@112.003,28.6 v1(112.003,29.525) C2.1@112.003,30.375 ; v1@128.105,13.27 U6.4@129.875,13.27 ; v2@143.975,12.45 v2(144,12.475) ; v2(151.575,60.925) 151.6,60.95 Q79.2@151.6,62.55 ; v2(167.225,11.075) v2@167.25,11.1 ; v2(176.55,61.175) 176.575,61.2 Q81.2@176.575,62.75 ; Q82.2@189.6,12.775 189.6,11.225 v2(189.675,11.15) ; v2(203.225,60.975) Q83.2@203.225,62.625 ; v2(213.225,11.075) Q84.2@213.225,12.775 ; v1(225.575,65.325) Q86.2@227.125,65.325 ; Q85.2@237.275,12.775 237.275,11.075 v2(237.4,10.95) ; M24.9@256,5 256.228,4.772 v2(263.703,4.772) ; Q87.2@260.75,12.775 v2(262.575,12.775) ; v2@263.678,4.822 C18.1@265.7,4.822 ; Q88.2@274.275,62.35 274.3,62.325 v1@275.5,62.325
  Top Layer w0.762: v1@83.05,59.8 83.672,59.178 C6.1@84.425,59.178 88.425,59.178 C7.1@88.45,59.203 ; C15.1@93.522,23.7 v1(93.85,23.7) ; C1.1@112.003,28.6 C12.1@114.003,28.6 ; v2(118.95,11.075) Q77.2@118.95,12.45 ; Q78.2@142.65,12.45 v2@143.975,12.45 ; v2@167.25,11.1 Q80.2@167.25,12.625 ; P6.3@255.75,57 v2(251.025,57) v2(251.025,59.05) 251.075,59 P6.1@255.75,59 ; P6.4@260.25,57 264.25,57 264.45,57.2 v2(264.45,59) P6.2@260.25,59
  Top Layer w1.016: C21.1@30.125,25.678 v3(30.125,28.075) ; U4.1@34.425,28.375 36.6,28.375 37.278,29.053 C23.1@44.4,29.053 C22.1@47.175,29.053 ; C28.1@142.328,17.45 v2@143.95,17.45 ; v2(251.625,18.275) 251.625,21.225 ; P6.37@255.75,23 251.625,23 251.625,21.225 ; P6.38@260.25,23 P6.40@260.25,21 P6.39@255.75,21 251.85,21 251.625,21.225
  Bottom Layer w0.254: v1(89.775,59.153) 91.347,59.153 91.85,58.65 v1(91.85,53.425) 97.625,53.425 v1(97.975,53.075) ; v1(102.775,38.35) 102.8,38.375 v1(102.8,39.45)
  Bottom Layer w0.508: P4.6@46.24,6.74 P4.5@46.24,4.2 48.391,2.049 S1.2@60.125,2.049
  other v1: 128.08,13.27 112.95,28.6 76.525,33.675 110.828,37.225 77.725,39.175 77.722,43.647 55.693,47.475 111.25,50.7 85.526,59.157 86.8,59.178 275.475,62.35
  other v2: 30.725,3.45 13.1,6.075 13.1,6.975 143.925,17.425 37.15,17.575 232.275,18.55 231.275,18.575 233.175,18.575 228.75,18.65 226.8,18.675 227.775,18.675 255.925,21.15 256.825,21.15 257.825,21.15 253.05,21.175 253.95,21.175 254.95,21.175 43.175,29.053 46.325,29.05 50.602,34.4 37.275,37.425 36.175,37.45 36.2,38.35 37.275,38.35 264.475,57.05 251,57.875 264.45,58 231.8,59 232.7,59 233.7,59 52.575,61.65
  other v3: 36.85,28.775
JTCK: P5.9 P19.2 R13.2 U1.109 | length 86.8
  Top Layer w0.254: R13.2@19.628,53.875 20.225,54.472 v1(20.225,56.175) 20.225,58.585 P5.9@20.08,58.73 ; v1(74.15,48.975) 74.235,48.89 U1.109@83.202,48.89
  Bottom Layer w0.254: P5.9@20.08,58.73 21.375,60.025 21.375,73.615 P19.2@21.24,73.75 ; v1(20.225,56.175) 20.6,55.8 55.875,55.8 62.7,48.975 v1(74.15,48.975)
JTDI: P5.5 R15.2 U1.110 | length 84.3
  Top Layer w0.254: R15.2@11.828,50.95 13.25,50.95 15,52.7 P5.5@15,58.73 ; v1(74.175,48.2) 74.365,48.39 U1.110@83.202,48.39
  Bottom Layer w0.254: P5.5@15,58.73 15,55.838 16.025,54.813 55.512,54.813 62.125,48.2 v1(74.175,48.2)
JTDO: P5.13 R17.2 U1.133 | length 70.6
  Top Layer w0.254: R17.2@24.597,53.9 24.597,56.497 25.16,57.06 P5.13@25.16,58.73 ; R17.2@24.673,53.977 v1(24.725,53.925) ; v1@69.425,42.375 69.675,42.375 75.16,36.89 U1.133@83.202,36.89
  Bottom Layer w0.254: v1@24.775,53.95 55.375,53.95 66.925,42.4 v1(69.4,42.4)
JTMS: P5.7 P19.1 R16.2 U1.105 | length 107.9
  Top Layer w0.254: P5.7@17.54,58.73 16.35,57.54 16.35,52 17.4,50.95 R16.2@24.597,50.95 ; U1.105@86.501,50.69 v1@86.501,53.151
  Bottom Layer w0.254: P19.1@18.7,73.75 18.85,73.6 18.85,60.04 P5.7@17.54,58.73 19.52,56.75 56.275,56.75 63.15,49.875 73.1,49.875 76.296,53.071 86.396,53.071 v1(86.451,53.126)
JTRST: P5.3 R14.2 U1.134 | length 85.8
  Top Layer w0.254: R14.2@11.828,53.975 12.46,54.607 P5.3@12.46,58.73 ; v1(69.178,41.727) 69.178,41.778 74.567,36.39 U1.134@83.202,36.39
  Bottom Layer w0.254: P5.3@12.46,58.73 12.46,57.59 16.925,53.125 55.15,53.125 66.548,41.727 v1(69.178,41.727)
LD1: R19.2 U1.34 | length 91
  Top Layer w0.254: R19.2@40.5,16.103 47.647,16.103 v2(47.65,16.1) ; U1.34@101.501,29.59 101.501,28.299 101.6,28.2 104.725,28.2 v1(104.925,28.4)
  Bottom Layer w0.254: v2(47.65,16.1) 50.925,12.825 62.65,12.825 63.05,12.425 63.05,7.45 63.418,7.081 69.225,7.081 71.319,9.175 85.575,9.175 86.231,8.519 94.869,8.519 98.175,11.825 98.175,20.825 104.925,27.575 v1(104.925,28.4)
LD2: R21.2 U1.35 | length 77.5
  Top Layer w0.254: R21.2@48.7,57.197 49.228,57.725 v1(50.725,57.725) ; v1(100.175,38.95) 100.175,33.375 102.001,31.549 U1.35@102.001,29.59
  Bottom Layer w0.254: v1(50.725,57.725) 56.625,57.725 63.55,50.8 73,50.8 75.856,53.656 86.869,53.656 90.9,49.625 90.9,40.202 91.758,39.344 99.856,39.344 v1@100.212,38.988
LD3: R23.2 U1.103 | length 50.6
  Top Layer w0.254: v1(63,24.375) 63.05,24.425 v1(63.05,27.725) ; v1@87.325,49.175 87.501,49.351 U1.103@87.501,50.69
  Bottom Layer w0.254: v1@63,24.275 63,16.85 v2(63.55,16.3) ; v1(63.05,27.725) 67.925,32.6 78.001,32.6 87.325,41.924 v1(87.325,49.2)
LD4: R25.2 U1.104 | length 69.5
  Top Layer w0.254: v1(65.85,31.35) 65.85,27.275 v1(65.875,27.25) ; v1@81.925,11.225 v1(81.925,11.2) 81.925,9.5 82.278,9.147 R25.2@84.25,9.147 R25.2@84.2,9.097 ; v1(86.525,49.25) 86.575,49.25 87.001,49.676 U1.104@87.001,50.69
  Bottom Layer w0.254: v1(65.85,31.35) 67.625,33.125 77.275,33.125 86.525,42.375 v1(86.525,49.25) ; v1@65.875,27.275 v1(65.875,27.25) 65.875,19.375 74.05,11.2 v1(81.925,11.2)
LD5: R27.2 U1.46 | length 40.3
  Top Layer w0.254: R27.2@80.5,57.197 80.5,56.1 81.3,55.3 v1(83.425,55.3) ; v1(101.455,38.927) 101.471,38.911 101.471,36.446 101.425,36.4 101.935,35.89 U1.46@104.301,35.89
  Bottom Layer w0.254: v1(83.425,55.3) 85.8,55.3 91.306,49.793 91.306,40.37 91.926,39.75 100.5,39.75 101.35,38.9 101.377,38.927 v1(101.455,38.927)
LD6: R29.2 U1.47 | length 52.4
  Top Layer w0.254: v1@102.075,36.725 102.41,36.39 U1.47@104.301,36.39 ; R29.2@111.4,15.703 v1@111.4,16.925
  Bottom Layer w0.254: v1(102.05,36.725) 91.825,36.725 90.625,35.525 90.625,33.25 91.7,32.175 108.225,32.175 111.422,28.978 v1(111.422,16.897)
LD7: R31.2 U1.135 | length 42.6
  Top Layer w0.254: U1.135@83.202,35.89 90.64,35.89 91.875,37.125 v1(91.875,40.55) ; v1@102.7,62.1 R31.2@104.222,62.1
  Bottom Layer w0.254: v1(91.875,40.55) 91.9,40.575 91.9,49.575 93.388,51.063 97.075,51.063 101.237,55.225 101.275,55.225 101.275,61.1 102.253,62.078 v1(102.725,62.078)
LD8: R33.2 U1.136 | length 55.1
  Top Layer w0.254: U1.136@83.202,35.39 89.835,35.39 v1(90,35.225) ; v1(111.15,12.675) 115.628,8.197 R33.2@116.7,8.197
  Bottom Layer w0.254: v1(90,35.225) 90,33.3 91.575,31.725 100.776,31.725 100.781,31.729 107.771,31.729 109.875,29.625 109.875,13.95 v1(111.15,12.675)
LD9: R35.2 U1.137 | length 79.5
  Top Layer w0.254: U1.137@83.202,34.89 89.235,34.89 89.775,34.35 91.125,34.35 v1(91.275,34.5) ; v1(139.025,16.075) 139.079,16.021 139.079,8.646 139.528,8.197 R35.2@140.5,8.197
  Bottom Layer w0.254: v1(91.275,34.5) 91.275,33.175 91.725,32.725 132.4,32.725 139.079,26.046 139.025,25.991 v1(139.025,16.075)
LD10: R37.2 U1.139 | length 81.9
  Top Layer w0.254: U1.139@83.202,33.89 92.515,33.89 v1(92.525,33.9) 92.521,33.904 92.521,40.141 v1@92.804,40.425 ; v1(142.9,61.725) R37.2@143.947,61.725
  Bottom Layer w0.254: v1(92.75,40.425) 92.75,41.366 92.754,41.371 92.306,41.819 92.306,49.407 93.556,50.656 97.243,50.656 100.762,54.175 135.4,54.175 v1@142.925,61.7
LD11: R39.2 U1.140 | length 102.7
  Top Layer w0.254: U1.140@83.202,33.39 91.916,33.39 v1(91.954,33.352) ; v1(164.4,18.675) 164.4,9 165.203,8.197 R39.2@165.9,8.197
  Bottom Layer w0.254: v1(91.954,33.352) 156.298,33.352 164.4,25.25 v1(164.4,18.675)
LD12: R41.2 U1.69 | length 79.3
  Top Layer w0.254: U1.69@104.301,47.39 107.916,47.39 108.033,47.507 167.832,47.507 168.575,48.25 v1(168.575,48.9) ; v1(168.6,61.8) 168.675,61.725 R41.2@169.797,61.725
  Bottom Layer w0.254: v1(168.575,48.9) v1@168.575,61.725
LD13: R43.2 U1.70 | length 126.2
  Top Layer w0.254: v1(101.225,40) 101.925,40.7 101.925,47.125 102.69,47.89 U1.70@104.301,47.89 U1.70@104.325,47.913 ; v1(185.8,18.225) 185.8,8.675 186.278,8.197 R43.2@187.6,8.197 ; v1(185.825,32.525) 185.85,32.55 v1(185.85,34.175)
  Bottom Layer w0.254: v1(101.225,40) 182.625,40 185.85,36.775 v1(185.85,34.175) ; v1(185.8,18.225) 185.8,32.5 v1(185.825,32.525)
LD14: R45.2 U1.73 | length 108.7
  Top Layer w0.254: U1.73@102.501,50.69 102.501,51.401 102.569,51.469 118.507,51.469 119.25,50.725 ; 119.25,50.69 119.285,50.69 120.4,49.575 195.275,49.575 195.75,49.1 v1(195.625,49.1) ; v1(195.775,61.675) 195.825,61.725 R45.2@196.722,61.725
  Bottom Layer w0.254: v1(195.625,49.1) 195.625,61.5 v1@195.825,61.7
LD15: R47.2 U1.74 | length 147.9
  Top Layer w0.254: v1(100.65,40.625) 100.7,40.625 101.25,41.175 101.25,47.325 102.001,48.076 U1.74@102.001,50.69 ; v1(205.975,18.65) 205.975,11.625 209.403,8.197 R47.2@211.3,8.197 ; v1(205.975,32.6) v1(205.975,34.225)
  Bottom Layer w0.254: v1(100.65,40.625) 199.5,40.625 v1@205.9,34.225 ; v1(205.975,18.65) v1(205.975,32.6)
LD16: R49.2 U1.75 | length 164.6
  Top Layer w0.254: v1@100.25,41.125 100.25,47.275 101.501,48.526 U1.75@101.501,50.69 ; v1(212.55,32.375) v1(212.55,34.15) ; v1(218.15,18.425) 224.972,18.425 R49.2@235.2,8.197
  Bottom Layer w0.254: v1(100.225,41.175) 205.45,41.175 v1@212.512,34.113 ; v1@212.575,32.375 212.575,24.125 v1@218.213,18.487
LD17: R51.2 U1.76 | length 135.5
  Top Layer w0.254: U1.76@101.001,50.69 101.001,51.876 101.813,52.688 119.012,52.688 120.881,50.819 213.656,50.819 v1(214.025,50.45) ; v1(214.15,64.675) 214.225,64.75 R51.2@219.872,64.75
  Bottom Layer w0.254: v1(214.025,50.45) 214.025,64.55 v1(214.15,64.675)
LD18: R53.2 U1.26 | length 195.7
  Top Layer w0.254: U1.26@97.501,29.59 97.513,29.579 97.513,27.512 99.775,25.25 118.049,25.25 123.355,30.556 215.819,30.556 v1(216.175,30.2) ; v1(253.05,15.4) 253.05,13.947 R53.2@253.097,13.9
  Bottom Layer w0.254: v1(216.175,30.2) 222.575,30.2 223.904,31.529 257.346,31.529 264.3,24.575 264.3,18.575 261.125,15.4 v1(253.05,15.4)
LD19: R55.2 U1.27 | length 204.3
  Top Layer w0.254: U1.27@98.001,29.59 98.001,27.624 99.969,25.656 117.881,25.656 123.187,30.962 v1(216.312,30.962)
  Bottom Layer w0.254: v1(216.312,30.962) 222.762,30.962 223.736,31.936 270.636,31.936 272.65,33.95 272.65,57.325 v1(272.625,57.35)
LD20: P6.5 U1.28 | length 211.1
  Top Layer w0.254: U1.28@98.501,29.59 98.501,27.699 100.137,26.063 117.713,26.063 123.019,31.369 215.769,31.369 v1(216.125,31.725) ; P6.5@255.75,55 256.875,55 257.875,56 v1(268.875,56)
  Bottom Layer w0.254: v1(216.125,31.725) 222.951,31.725 223.568,32.342 266.092,32.342 268.875,35.125 v1(268.875,56)
LD21: P6.7 U1.29 | length 205.9
  Top Layer w0.254: U1.29@99.001,29.59 99.001,28.274 100.806,26.469 117.544,26.469 122.85,31.775 215.259,31.775 v1(215.886,32.402) ; P6.7@255.75,53 256.975,53 257.85,53.875 v1@268.05,53.875
  Bottom Layer w0.254: v1(215.886,32.402) 223.052,32.402 223.399,32.749 265.424,32.749 268.05,35.375 v1(268.05,53.825)
LD22: P6.9 U1.44 | length 191.1
  Top Layer w0.254: U1.44@104.301,34.89 215.51,34.89 v1(216.275,34.125) ; P6.9@255.75,51 256.875,51 257.925,52.05 v1(267.15,52.05)
  Bottom Layer w0.254: v1(216.275,34.125) 263.95,34.125 267.15,37.325 v1(267.15,52.05)
LD23: P6.11 U1.45 | length 186.4
  Top Layer w0.254: U1.45@104.301,35.39 v1(216.3,35.39) ; P6.11@255.75,49 256.8,49 257.75,49.95 v1@265.975,49.95
  Bottom Layer w0.254: v1(216.3,35.39) 217.159,34.531 263.093,34.531 266.05,37.488 v1(266.05,49.95)
LD24: P6.13 U1.96 | length 177.1
  Top Layer w0.254: U1.96@91.001,50.69 91.001,53.376 96.815,59.19 121.705,59.19 123.574,57.321 216.275,57.321 216.275,57.4 218.787,59.912 234.763,59.912 247.675,47 P6.13@255.75,47
LD25: P6.15 U1.97 | length 180.2
  Top Layer w0.254: U1.97@90.501,50.69 90.501,53.451 96.647,59.597 121.873,59.597 123.743,57.727 215.95,57.727 218.541,60.319 235.181,60.319 247.925,47.575 v1(253.2,47.575) ; v1(253.225,45) P6.15@255.75,45
  Bottom Layer w0.254: v1(253.2,47.575) 253.2,45.025 v1(253.225,45)
LD26: P6.17 U1.98 | length 183.5
  Top Layer w0.254: U1.98@90.001,50.69 90.001,53.526 96.479,60.003 122.042,60.003 123.911,58.134 215.6,58.134 218.191,60.725 235.45,60.725 247.9,48.275 v1(252.625,48.275) ; v1(252.625,43) P6.17@255.75,43
  Bottom Layer w0.254: v1(252.625,43) v1(252.625,48.275)
LD27: P6.19 U1.99 | length 186.8
  Top Layer w0.254: U1.99@89.501,50.69 89.501,53.601 96.31,60.409 122.21,60.409 124.079,58.54 215.365,58.54 218.025,61.2 235.601,61.2 247.976,48.825 v1(252.05,48.825) ; v1(252.05,40.975) 252.075,41 P6.19@255.75,41
  Bottom Layer w0.254: v1(252.05,40.975) v1(252.05,48.825)
LD28: P6.21 U1.111 | length 182
  Top Layer w0.254: U1.111@83.202,47.89 84.85,47.89 84.944,47.796 92.696,47.796 93.227,48.327 v1(94.13,48.327) ; v1(244.825,48.375) 244.825,41.025 246.85,39 P6.21@255.75,39
  Bottom Layer w0.254: v1(94.13,48.327) 218.125,48.327 219.373,49.575 243.625,49.575 v1(244.825,48.375)
LD29: P6.23 U1.112 | length 182.7
  Top Layer w0.254: U1.112@83.202,47.39 92.865,47.39 93.225,47.75 v1(93.75,47.75) ; v1(244.05,47.75) 244.05,40.2 247.25,37 P6.23@255.75,37
  Bottom Layer w0.254: v1(93.75,47.75) 218.275,47.75 219.694,49.169 242.631,49.169 v1(244.05,47.75)
LD30: P6.25 U1.113 | length 184
  Top Layer w0.254: U1.113@83.202,46.89 83.231,46.919 93.044,46.919 93.202,47.077 v1(93.68,47.077) ; v1(243.425,47.075) 243.464,47.036 243.464,38.536 247,35 P6.25@255.75,35
  Bottom Layer w0.254: v1(93.68,47.077) 93.682,47.075 218.475,47.075 220.162,48.762 241.738,48.762 v1(243.425,47.075)
LD31: P6.27 U1.7 | length 190.9
  Top Layer w0.254: U1.7@88.001,29.59 88.001,23.749 91.713,20.037 126.025,20.037 128.738,22.75 v1@219.425,22.75 ; P6.27@255.75,33 257.7,33 258.025,32.675 v1(258.025,22.8)
  Bottom Layer w0.254: v1(219.375,22.725) 257.95,22.725 v1(258.025,22.8)
LD32: P6.29 U1.114 | length 187.7
  Top Layer w0.254: U1.114@83.202,46.39 v1(93.26,46.39) ; v1(242.935,46.39) 242.935,34.19 246.125,31 P6.29@255.75,31
  Bottom Layer w0.254: v1(93.26,46.39) 218.575,46.39 220.51,48.325 241,48.325 v1(242.935,46.39)
LD33: P6.31 U1.115 | length 188.7
  Top Layer w0.254: U1.115@83.202,45.89 92.87,45.89 92.961,45.8 v1(93.675,45.8) ; v1(242.325,45.8) 242.354,45.771 242.354,33.071 246.425,29 P6.31@255.75,29
  Bottom Layer w0.254: v1(93.675,45.8) 219.05,45.8 221.169,47.919 240.206,47.919 v1(242.325,45.8)
LD34: P6.33 U1.116 | length 189.3
  Top Layer w0.254: U1.116@83.202,45.39 93.01,45.39 93.275,45.125 v1(93.55,45.125) ; v1(241.825,45.125) 241.879,45.071 241.879,32.746 247.625,27 P6.33@255.75,27
  Bottom Layer w0.254: v1(93.55,45.125) 219.275,45.125 221.55,47.4 239.55,47.4 v1(241.825,45.125) v1@241.875,45.125
LD35: P6.35 U1.117 | length 190.1
  Top Layer w0.254: U1.117@83.202,44.89 92.76,44.89 93.2,44.45 v1(93.475,44.45) ; v1(241.35,44.4) 241.35,32.075 248.425,25 P6.35@255.75,25
  Bottom Layer w0.254: v1(93.475,44.45) 219.525,44.45 222.069,46.994 238.756,46.994 v1(241.35,44.4)
LD36: P6.6 U1.118 | length 204.6
  Top Layer w0.254: U1.118@83.202,44.39 92.635,44.39 93.227,43.798 v1(93.677,43.798) ; P6.6@260.25,55 v1@262.4,55
  Bottom Layer w0.254: v1(93.677,43.798) 219.973,43.798 219.975,43.8 222.6,46.425 232,46.425 242.268,36.157 260.432,36.157 262.456,38.181 v1(262.456,54.981)
LD37: P6.8 U1.119 | length 205.3
  Top Layer w0.254: U1.119@83.202,43.89 92.56,43.89 93.3,43.15 93.338,43.188 v1(93.365,43.188) ; P6.8@260.25,53 v1(263.275,53)
  Bottom Layer w0.254: v1(93.365,43.188) 220.162,43.188 222.994,46.019 231.025,46.019 241.293,35.751 261.951,35.751 263.275,37.075 v1(263.275,53)
LD38: P6.10 U1.122 | length 204.9
  Top Layer w0.254: U1.122@83.202,42.39 92.7,42.39 92.935,42.625 v1(92.875,42.625) ; P6.10@260.25,51 v1(264.075,51)
  Bottom Layer w0.254: v1(92.875,42.625) 220.55,42.625 223.537,45.612 229.9,45.612 240.168,35.344 262.119,35.344 264.1,37.325 264.075,37.35 v1(264.075,51)
LD39: P6.12 U1.123 | length 205
  Top Layer w0.254: U1.123@83.202,41.89 v1(93.34,41.89) ; P6.12@260.25,49 v1(264.95,49)
  Bottom Layer w0.254: v1(93.34,41.89) 220.565,41.89 223.881,45.206 229.225,45.206 239.493,34.938 262.925,34.938 264.95,36.963 v1(264.95,49)
LD40: P6.14 U1.77 | length 164.3
  Top Layer w0.254: U1.77@100.501,50.69 100.501,51.951 101.645,53.094 119.18,53.094 121.049,51.225 214.275,51.225 215.504,49.996 218.471,49.996 v1(218.475,50) ; v1(247.55,50) 247.55,50.025 247.85,50.325 251.625,50.325 253.975,47.975 258.225,47.975 259.2,47 P6.14@260.25,47
  Bottom Layer w0.254: v1(218.475,50) v1(247.55,50)
LD41: P6.16 U1.78 | length 168.2
  Top Layer w0.254: U1.78@100.001,50.69 100.001,52.026 101.476,53.501 119.348,53.501 121.218,51.631 214.443,51.631 215.549,50.525 v1(217.775,50.525) ; v1(248.1,46.05) 258.15,46.05 259.2,45 P6.16@260.25,45
  Bottom Layer w0.254: v1(217.775,50.525) 217.779,50.529 247.769,50.529 248.1,50.199 v1(248.1,46.05)
LD42: P6.18 U1.79 | length 171.1
  Top Layer w0.254: U1.79@99.501,50.69 99.501,52.1 101.308,53.907 119.517,53.907 121.386,52.038 214.611,52.038 215.579,51.071 216.996,51.071 v1(217.05,51.125) ; v1@248.75,44.025 258.1,44.025 259.125,43 P6.18@260.25,43
  Bottom Layer w0.254: v1(217.05,51.125) 247.95,51.125 248.675,50.4 v1(248.675,44.025)